# Altium PCB PCB2.PcbDoc
Units mm, origin at the board's own origin, x right, y up, seen from the top; angles counter-clockwise.
Board outline 65.79 x 83.57 mm, 2 copper layers (Top Layer, Bottom Layer); 34 components, 47 nets, 149 pads, 0 vias.
Unrouted connection lines stored in the file: 79.
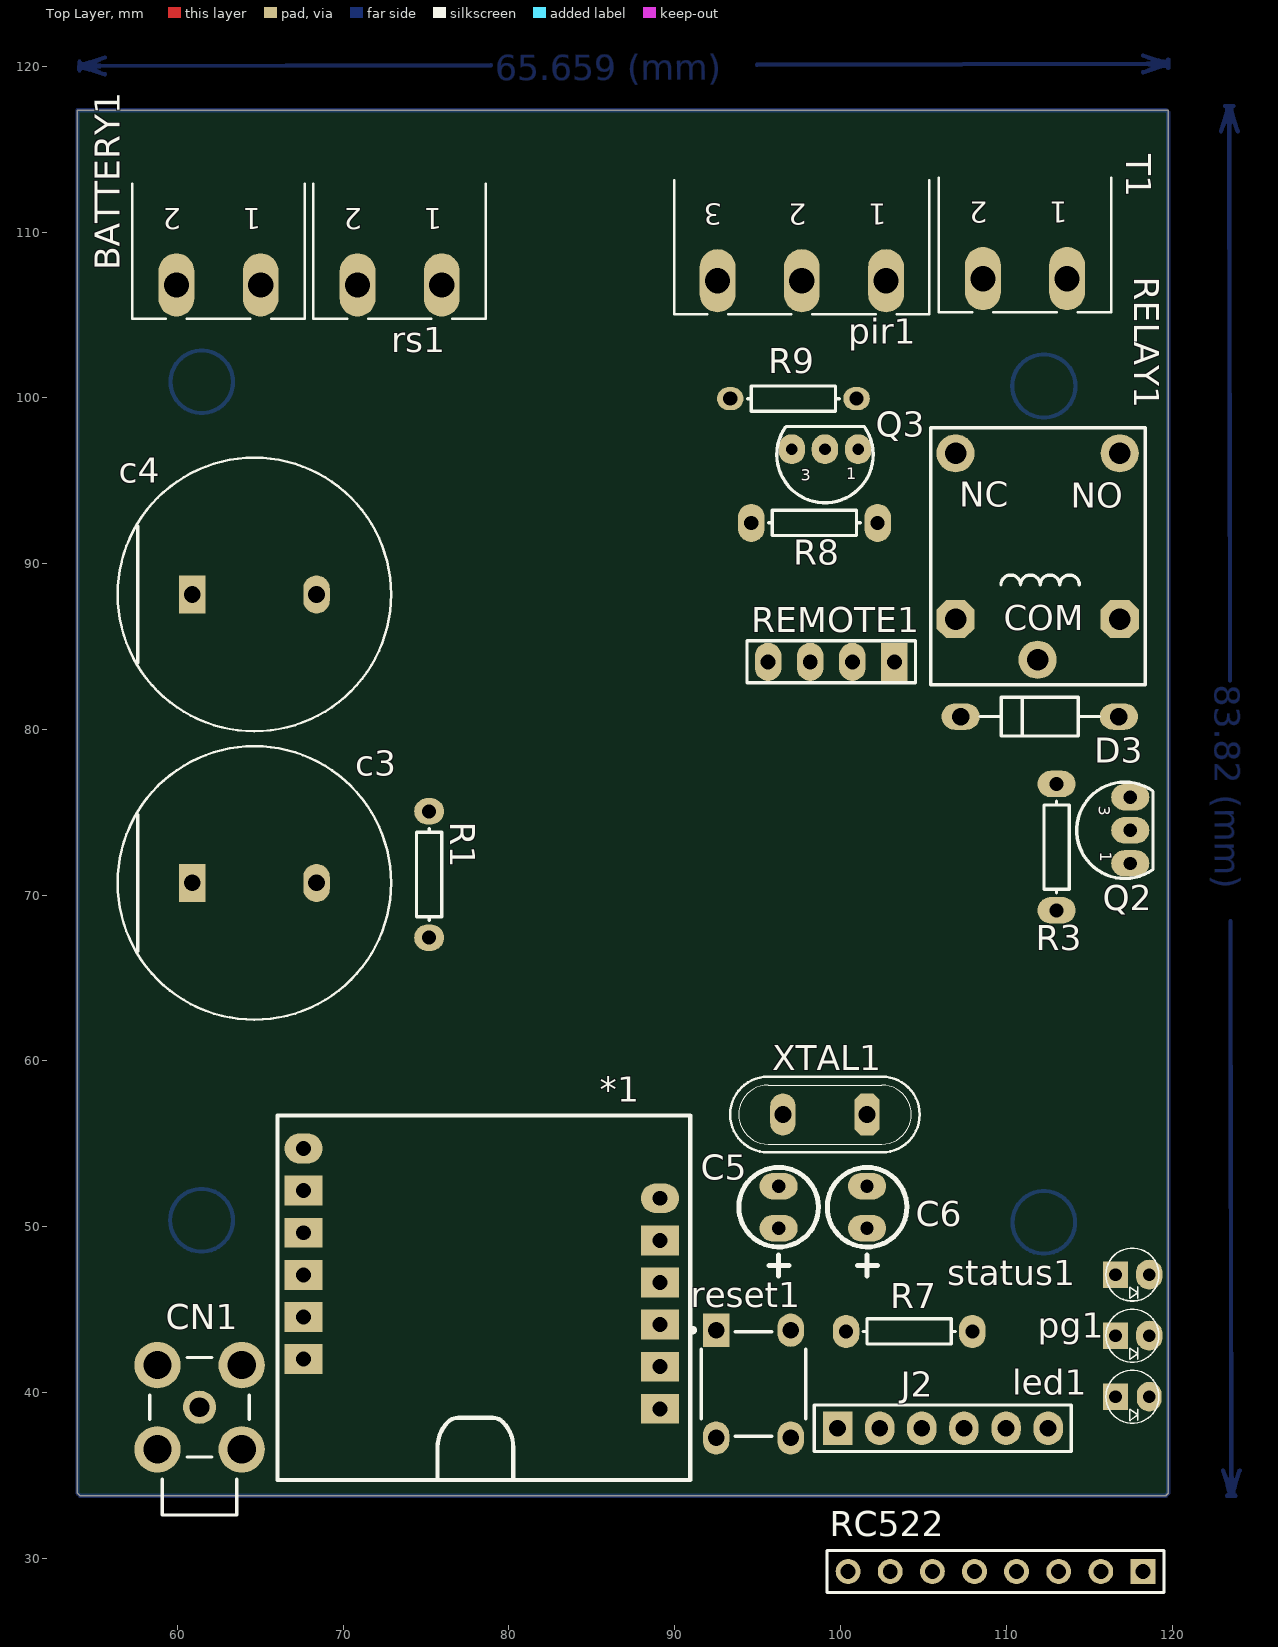
[diagram p0: Top Layer view]
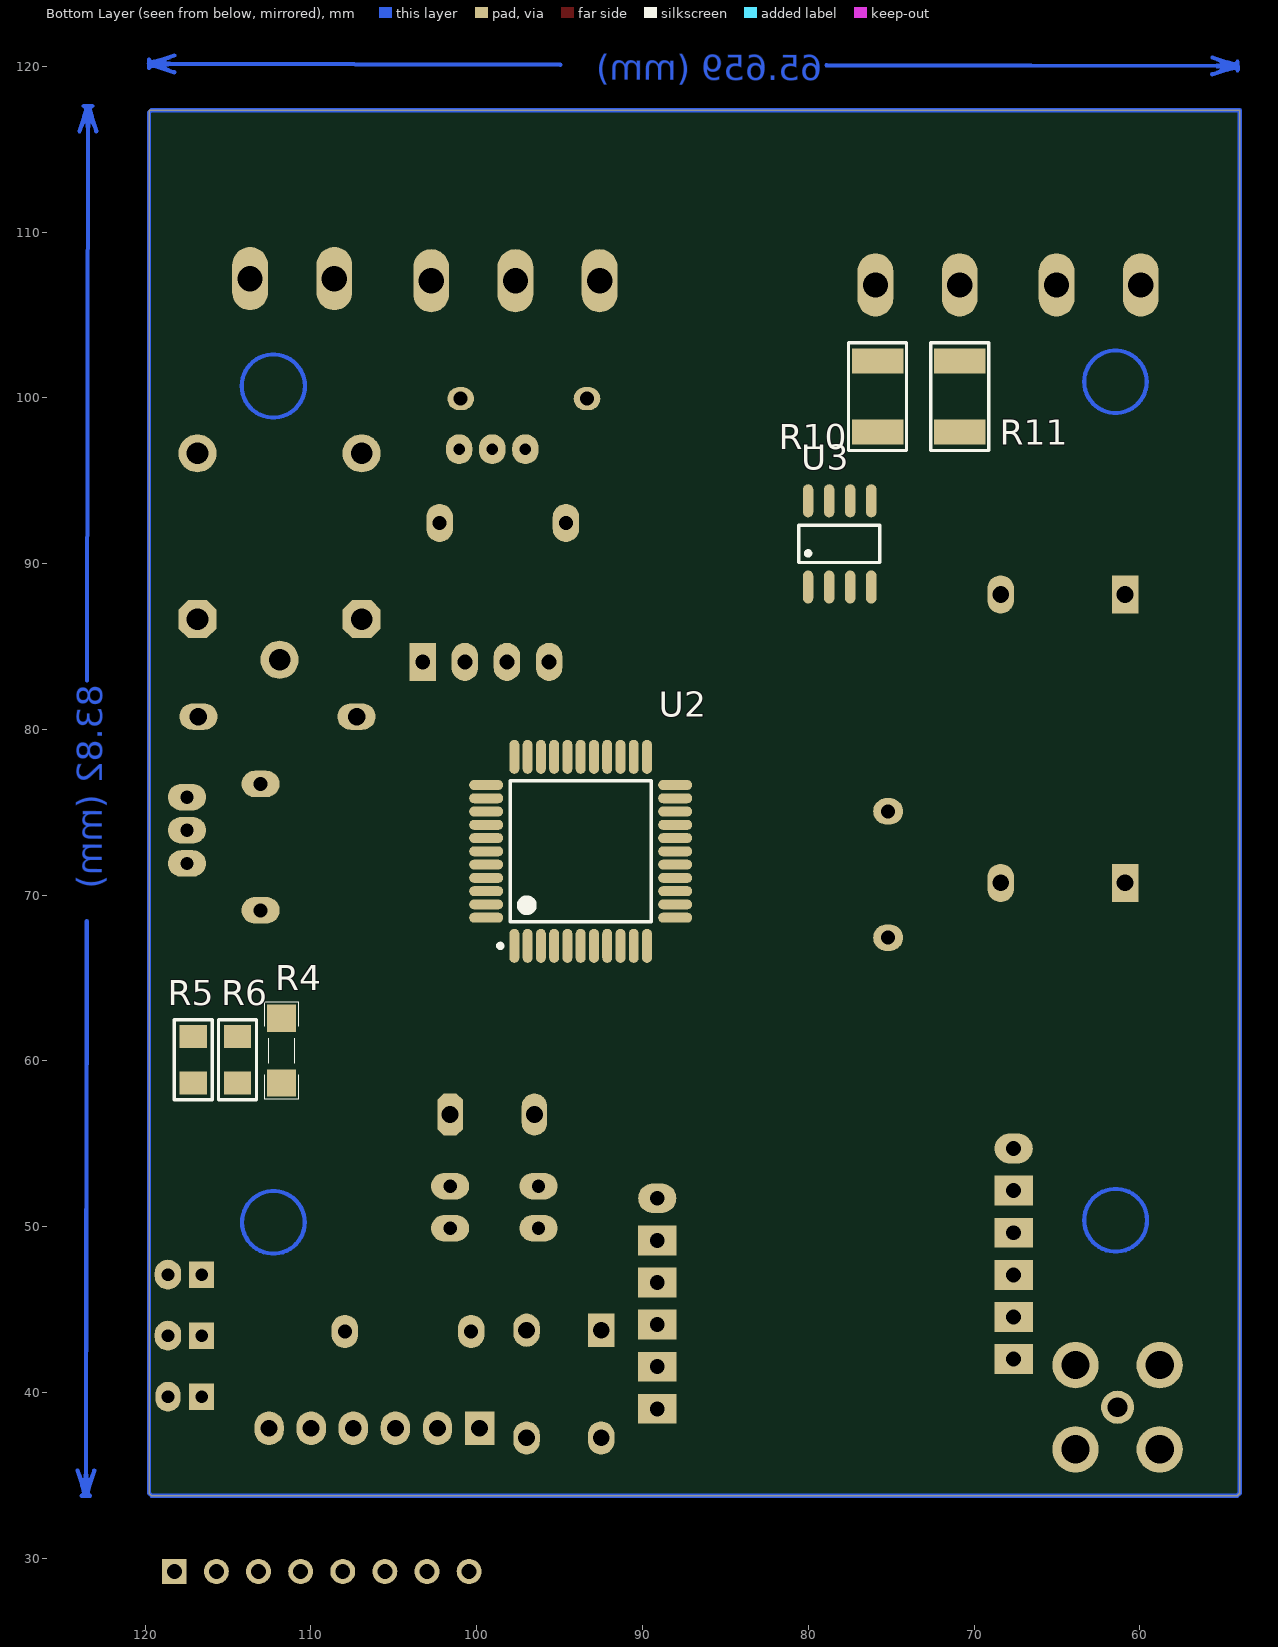
[diagram p1: Bottom Layer view, seen from below]

## Layer stack, top to bottom
Top Solder: solder mask 0.0102, Solder Resist, Dk 3.5
Top Layer: signal copper 0.0356
Dielectric 1: dielectric 0.32, FR-4, Dk 4.8
Bottom Layer: signal copper 0.0356
Bottom Solder: solder mask 0.0102, Solder Resist, Dk 3.5

## Board outline
53.975,33.931 54.124,33.782 119.612,33.782 119.761,33.931 119.761,117.348 53.975,117.348

## Design rules (kind name [scope] priority, off if disabled: settings)
Clearance [All] p1: gap=0.2 ignorepadtopadclearanceinfootprint=FALSE
PolygonConnect [All] p1: connectstyle=Relief reliefconductorwidth=0.254 reliefentries=4 polygonreliefangle="90 Angle" airgapwidth=0.254
RoomDefinition Sheet2 [InComponentClass('Sheet2')] p1: confinementstyle=ConfineIn formatcopy=TRUE lockcomponents=FALSE outline 0,0 50.8,0 50.8,25.4 0,25.4
RoutingVias [All] p1: holewidth=0.711 width=1.27 viastyle="Through Hole" minholewidth=0.711 minwidth=1.27 maxholewidth=0.711 maxwidth=1.27
SolderMaskExpansion [All] p1: expansion=0.102 istentingtop=FALSE
Width [All] p1: maxlimit=1.1 minlimit=0.5 preferedwidth=0.8
30 further rules are at their usual default settings.

## Components (designator, comment, footprint, x,y, rotation, side; value= is the part's Value field where it differs from the comment)
*1 "Component_1" PCBComponent_1 78.359,45.72 r180 top
BATTERY1 "PHOENIX" "MSTB 2,5/2-G-5,08" 62.484,106.807 r180 top
c3 "ECA1CM472" FP-RAD-TH-D_16_0_5-L_25_2-MFG 64.643,70.739 r0 top
c4 "ECA1CM472" FP-RAD-TH-D_16_0_5-L_25_2-MFG 64.643,88.138 r0 top
C5 "33PF" RB.1/.3 96.266,49.911 r270 top
C6 "33PF" RB.1/.3 101.6,49.911 r270 top
CN1 "ANTENNA" SMA-Right 61.341,39.116 r90 top
D3 "1N4007RLG" ONSC-AXIAL_LEAD-2-59-10_P 112.014,80.772 r0 top
J2 "Header6X1" "HEADER 6X1" 99.822,37.846 r0 top
led1 "LED3MM" LED3mm_GRN#1 117.602,39.751 r0 top
pg1 "LED3MM" LED3mm_GRN#2 117.602,43.434 r0 top
pir1 "PHOENIX" "MSTB 2,5/3-G-5,08" 97.663,107.061 r180 top
Q2 "C945" c945#1 117.475,73.914 r270 top
Q3 "C945" c945#2 99.06,96.901 r0 top
R1 "Res1" AXIAL-0.3#1 75.184,71.247 r90 top value=10K
R3 "Res1" AXIAL-0.3#2 113.03,72.898 r90 top value=330
R4 "1K" RESC4817X04N 111.76,60.624 r90 bottom
R5 "Resistor SMD" "1206 Resistor" 117.094,60.071 r90 bottom
R6 "Resistor SMD" "1206 Resistor" 114.427,60.071 r90 bottom
R7 "Res1" AXIAL-0.3#3 104.14,43.688 r0 top value=10K
R8 "Res1" AXIAL-0.3#2 98.425,92.456 r0 top value=330
R9 "Res1" AXIAL-0.3#4 97.155,99.949 r180 top value=330
R10 "Resistor SMD" "1812 Resistor" 75.819,100.076 r90 bottom
R11 "Resistor SMD" "1812 Resistor" 70.866,100.076 r90 bottom
RC522 "Header 8" HDR1X8 118.237,29.21 r180 top
RELAY1 "Relay" "Relay 15.40x12.10x13.10" 111.887,84.201 r0 top
REMOTE1 "Header 4" HDR1X4 103.251,84.074 r180 top
reset1 "EVQ-PAE09K" FP-EVQ-PAE09K-MFG 94.742,40.513 r0 top
rs1 "PHOENIX" "MSTB 2,5/2-G-5,08" 73.406,106.807 r180 top
status1 "LED3MM" LED3mm_GRN#2 117.602,47.117 r0 top
T1 "ALARM" "MSTB 2,5/2-G-5,08" 111.125,107.188 r180 top
U2 "ATmega16" 44A_M 93.726,72.644 r90 bottom
U3 "MAX485" SOIC-8 78.105,91.186 r90 bottom
XTAL1 "11.0592 MHz" My_Crystal 99.06,56.769 r180 top

## Footprints (in the part's own frame and the unit in brackets; to place one, negate y for a bottom-side part, rotate by r counter-clockwise, add the part's x,y. Pads: shape width x height; smd on the part's side, far side on the other; paste and mask are expansions set on the pad)
44A_M [mm] "Thin QFP, 44-Leads, Body 10x10mm, Pitch 0.8mm, IPC Low Density"
  oval 2.05x0.6 smd: 1(-5.7,4) 2(-5.7,3.2) 3(-5.7,2.4) 4(-5.7,1.6) 5(-5.7,0.8) 6(-5.7,0) 7(-5.7,-0.8) 8(-5.7,-1.6) 9(-5.7,-2.4) 10(-5.7,-3.2) 11(-5.7,-4) 23(5.7,-4) 24(5.7,-3.2) 25(5.7,-2.4) 26(5.7,-1.6) 27(5.7,-0.8) 28(5.7,0) 29(5.7,0.8) 30(5.7,1.6) 31(5.7,2.4) 32(5.7,3.2) 33(5.7,4)
  oval 0.6x2.05 smd: 12(-4,-5.7) 13(-3.2,-5.7) 14(-2.4,-5.7) 15(-1.6,-5.7) 16(-0.8,-5.7) 17(0,-5.7) 18(0.8,-5.7) 19(1.6,-5.7) 20(2.4,-5.7) 21(3.2,-5.7) 22(4,-5.7) 34(4,5.7) 35(3.2,5.7) 36(2.4,5.7) 37(1.6,5.7) 38(0.8,5.7) 39(0,5.7) 40(-0.8,5.7) 41(-1.6,5.7) 42(-2.4,5.7) 43(-3.2,5.7) 44(-4,5.7)
  silkscreen extent -5.82,-4.25 4.25,4.98, body extent -5,-5 5,5, height 1.2
"1206 Resistor" [mil]
  rect 55x65 smd: 1(-55,0) 2(55,0)
  silkscreen extent -95,-45 95,45, body extent -63,-31 63,31, height 24
"1812 Resistor" [mm]
  rect 1.5x3.1 smd: 1(-2.147,0) 2(2.147,0)
  silkscreen extent -3.25,-1.75 3.25,1.75, body extent -2.25,-1.6 2.25,1.6, height 1.6
AXIAL-0.3#1 [mm] "Axial Device, Thru-Hole; 2 Leads; 0.3 in Pin Spacing"
  oval 1.6x1.8 hole 0.85: 1(-3.81,0) 2(3.81,0)
  silkscreen extent -2.77,-0.76 2.77,0.76
AXIAL-0.3#2 [mm] "Axial Device, Thru-Hole; 2 Leads; 0.3 in Pin Spacing"
  oval 1.6x2.3 hole 0.85: 1(-3.81,0) 2(3.81,0)
  silkscreen extent -2.77,-0.76 2.77,0.76
AXIAL-0.3#3 [mm] "Axial Device, Thru-Hole; 2 Leads; 0.3 in Pin Spacing"
  oval 1.6x2 hole 0.85: 1(-3.81,0) 2(3.81,0)
  silkscreen extent -2.77,-0.76 2.77,0.76
AXIAL-0.3#4 [mm] "Axial Device, Thru-Hole; 2 Leads; 0.3 in Pin Spacing"
  oval 1.6x1.4 hole 0.85: 1(-3.81,0) 2(3.81,0)
  silkscreen extent -2.77,-0.76 2.77,0.76
c945#1 [mm] "NPN Transistor"
  oval 1.6x2.3 hole 0.8: 1(2,0) 2(0,0) 3(-2,0)
  silkscreen extent -2.91,-3.23 2.91,1.37, body extent -2.4,-2.18 2.36,1.45, height 9.82
c945#2 [mm] "NPN Transistor"
  oval 1.6x1.8 hole 0.7: 1(2,0) 2(0,0) 3(-2,0)
  silkscreen extent -2.91,-3.23 2.91,1.37, body extent -2.4,-2.18 2.36,1.45, height 9.82
FP-EVQ-PAE09K-MFG [mm]
  rect 1.6x2 hole 1 paste-1000 mask+0: A(-2.25,3.25)
  oval 1.6x2 hole 1 paste-1000 mask+0: A'(-2.25,-3.25) B(2.25,3.25) ""(2.25,-3.25)
  silkscreen extent -3.77,-3.15 3.15,3.37, body extent -3.25,-4.13 3.25,4.13, height 0.25
FP-RAD-TH-D_16_0_5-L_25_2-MFG [mm]
  rect 1.6x2.3 hole 1 paste-1000 mask+0: 1(-3.75,0)
  oval 1.6x2.3 hole 1 paste-1000 mask+0: 2(3.75,0)
  silkscreen extent -8.25,-8.25 8.25,8.25, body extent -8.35,-8.35 8.35,8.35, height 0.25
HDR1X4 [mm] "Connector; Header; 4 Position"
  rect 1.6x2.3 hole 0.9: 1(0,0)
  oval 1.6x2.3 hole 0.9: 2(2.54,0) 3(5.08,0) 4(7.62,0)
  silkscreen extent -1.27,-1.27 8.89,1.27, body extent -1.27,-1.28 8.89,1.26, height 8.38
HDR1X8 [mm] "Connector; Header; 8 Position"
  rect 1.5x1.5 hole 0.9: 1(0,0)
  round 1.5 hole 0.9: 2(2.54,0) 3(5.08,0) 4(7.62,0) 5(10.16,0) 6(12.7,0) 7(15.24,0) 8(17.78,0)
  silkscreen extent -1.27,-1.27 19.05,1.27
"HEADER 6X1" [mil]
  rect 70x80 hole 40: 1(0,0)
  oval 70x80 hole 40: 2(100,0) 3(200,0) 4(300,0) 5(400,0) 6(500,0)
  silkscreen extent -55,-55 555,55, body extent -52,-49 548,51, height 330
LED3mm_GRN#1 [mm]
  rect 1.5x1.6 hole 0.762: 1(-1.016,0)
  oval 1.5x1.8 hole 0.762: 2(1.016,0)
  silkscreen extent -1.6,-1.6 1.6,1.6, body extent -1.75,-1.75 1.75,1.75, height 3.9
LED3mm_GRN#2 [mm]
  rect 1.5x1.6 hole 0.762: 1(-1.016,0)
  oval 1.6x1.8 hole 0.762: 2(1.016,0)
  silkscreen extent -1.6,-1.6 1.6,1.6, body extent -1.75,-1.75 1.75,1.75, height 3.9
"MSTB 2,5/2-G-5,08" [mil] "Header, Nominal current: 12 A Rated voltage (III/2): 320 V Number of positions: 2 Pitch: 5.08 mm Color: green Contact surface: Tin Assembly: Soldering DESIGNER:ABBAS BASEREH"
  oval 85x150 hole 60: 1(-100,0) 2(100,0)
  silkscreen extent -205,-240 205,80, body extent -199,-394 201,79, height 340
"MSTB 2,5/3-G-5,08" [mil] "Header, Nominal current: 12 A Rated voltage (III/2): 320 V Number of positions: 3 Pitch: 5.08 mm Color: green Contact surface: Tin Assembly: Soldering  DESIGNER:ABBAS BASEREH"
  oval 85x150 hole 60: 1(-200,0) 2(0,0) 3(200,0)
  silkscreen extent -303,-238 303,80, body extent -300,-394 300,79, height 340
My_Crystal [mil]
  oct 60x100 hole 40: 1(-100,0)
  oval 60x100 hole 40: 2(100,0)
  silkscreen extent -225,-90 225,90
ONSC-AXIAL_LEAD-2-59-10_P [mm] "AXIAL, 2-Leads, Diameter 2.35mm"
  oval 2.3x1.6 hole 1.05: 1(-4.77,0) 2(4.77,0)
  silkscreen extent -3.6,-1.18 3.6,1.18
PCBComponent_1 [mm]
  rect 2.3x1.8 hole 0.9: 0(-10.75,6.7) 1(-10.75,4.16) 2(-10.75,1.62) 3(-10.75,-0.92) 4(-10.75,-3.46) 6(10.75,3.7) 7(10.75,1.16) 8(10.75,-1.38) 9(10.75,-3.92) 10(10.75,-6.46)
  oval 2.3x1.8 hole 0.9: 5(-10.75,-6) 11(10.75,-9)
  silkscreen extent -12.57,-11 12.32,11
RB.1/.3 [mm]
  oval 1.6x2.3 hole 0.8: 1(0,0) 2(-2.54,0)
  silkscreen extent -3.67,-2.4 2.87,2.4
"Relay 15.40x12.10x13.10" [mm]
  round 2.3 hole 1.3: 1(0,0) 2(-4.95,12.45) 3(4.95,12.45)
  oct 2.3x2.3 hole 1.3: 4(-4.95,2.45) 5(4.95,2.45)
  silkscreen extent -6.45,-1.5 6.5,14, body extent -6.05,-1.3 6.05,14, height 16.1
RESC4817X04N [mm] "Chip Resistor, 2-Leads, Body 4/80x1/70mm, IPC Medium Density-Design:Abbas Basereh"
  rect 1.65x1.75 smd: 1(-1.95,0) 2(1.95,0)
  silkscreen extent -2.92,-1.02 2.92,1.02, body extent -1.6,-0.8 1.6,0.8, height 1
SMA-Right [mm]
  round 2 hole 1.2: 1(0,0)
  round 2.8 hole 1.7: 2(-2.54,-2.54) 2(-2.54,2.54) 2(2.54,-2.54) 2(2.54,2.54)
  silkscreen extent -6.5,-3 3,3, body extent -11.6,-3.5 3.5,3.5, height 9.86
SOIC-8 [mm]
  oval 2x0.625 smd: 1(-2.6,1.905) 2(-2.6,0.635) 3(-2.6,-0.635) 4(-2.6,-1.905) 5(2.6,-1.905) 6(2.6,-0.635) 7(2.6,0.635) 8(2.6,1.905)
  silkscreen extent -1.13,-2.41 1.13,2.47, body extent -3.1,-2.41 3.1,2.41, height 1.7

## Part data
BATTERY1 rs1 T1: library part CON_Phoenix_MSTB_02, "2 Pitch: 5.08 mm Color: green Contact surface: Tin Assembly", Manufacturer="PHOENIX CONTACT", Max Current="12 A", Voltage="320 V", Category=Connector, ComponentLink1Description="Header, Nominal current: 12 A Rated voltage (III/2): 320 V Number of positions: 2 Pitch: 5.08 mm Color: green Contact surface: Tin Assembly: Soldering  DESIGNER:ABBAS BASEREH", ComponentLink2Description=Reference, Connector Type="PCB Terminal Block", Designer="ABBAS BASEREH", Mounting Technology=Through-Hole, PART.NO=PHOENIX, Pin Count=2, Positions=2, Revision 1=2017-3-1, Status=Unreleased
c3 c4: library part CMP-05427-001624-1, "Aluminum Electrolytic Capacitors (Radial Lead Type) 4700uF ±20% 16V", Capacitance=4.7mF, Case/Package=Radial, Dielectric Material=Aluminium, Leakage Current=3uA, Max Operating Temperature=85°C, Min Operating Temperature=-40°C, Package Quantity=100, Ripple Current=1.36A, Tolerance=20%, Voltage=16V, Construction=RADIAL, Diameter=16mm, Dissipation Factor=0.26%, Height=25mm, Height - Seated (Max)=1.063inch, Lead Diameter=0.8mm, Lead Free="Lead Free", Lead Pitch=7.5mm, Lead/Base Style=Straight, Length=25mm, Life (Hours)=2000Hour, Mount="Through Hole", Number of Pins=2, Packaging=Bulk, Polarity=Polar, Radiation Hardening=No, REACH SVHC="No SVHC", RoHS Compliant=Yes, Series=M, Termination=Radial, Voltage Rating=16V, Voltage Rating (DC)=16V
C5 C6: library part "Cap Semi", "Capacitor (Semiconductor SIM Model)", LatestRevisionDate=29-May-2009, LatestRevisionNote="IPC-7351 Footprint Added.", PackageDescription="Chip Capacitor", PackageReference=C1206, Published=8-Jun-2000, Publisher="Altium Limited"
D3: library part CMP-0902-00147-1, "Standard Recovery Rectifier, 2-Pin Axial_Lead, Pb-Free, Tape and Reel", Manufacturer="On Semiconductor", ComponentLink1Description="Manufacturer URL", ComponentLink1URL=http://www.onsemi.com/, ComponentLink2Description=Datasheet, ComponentLink2URL=http://www.onsemi.com/pub_link/Collateral/1N4001-D.PDF, ComponentLink3Description="Package Specification", ComponentLink3URL=http://www.onsemi.cn/pub_link/Collateral/59-10.PDF, DatasheetVersion="Rev. 13", IFSM Max (A)=30, IO(rec) Max (A)=1, Mounting Technology="Through Hole", PackageDescription="2-Pin, Axial Lead, Diameter 2.35 mm", PackageReference=AXIAL_LEAD-2-59-10, PackageVersion="Rev. U, 02/2005", Packing="Tape and Reel", PartNumber=1N4007RLG, RoHS=TRUE, Type="Standard Recovery", VRRM Max (V)=1000
led1 pg1 status1: library part "LED 3MM", "Light Emitting Diode", Designer="Ali Hafizi"
pir1: library part CON_Phoenix_MSTB_03, "3 Pitch: 5.08 mm Color: green Contact surface: Tin Assembly", Manufacturer="PHOENIX CONTACT", Max Current="12 A", Voltage="320 V", Category=Connector, ComponentLink1Description="Header, Nominal current: 12 A Rated voltage (III/2): 320 V Number of positions: 3 Pitch: 5.08 mm Color: green Contact surface: Tin Assembly: Soldering  DESIGNER:ABBAS BASEREH", ComponentLink2Description=Reference, Connector Type="PCB Terminal Block", Designer="ABBAS BASEREH", Mounting Technology=Through-Hole, PART.NO=PHOENIX, Pin Count=3, Positions=3, Revision 1=2017-3-1, Status=Unreleased
Q2 Q3: "NPN Silicon Epitaxial Planar Transistor", ComponentLink1Description="Manufacturer Link", ComponentLink1URL=http://www.taitroncomponents.com/, ComponentLink2Description=Datasheet, ComponentLink2URL=http://www.taitroncomponents.com/, DatasheetVersion=2017, LatestRevisionDate=2017, LatestRevisionNote="IPC-7351 Footprint Added.", PackageDescription="3-Pin SOT-23 Package 0.95 mm Pitch, 2.3 mm Lead Span", PackageReference=SOT23, PackageVersion=2017-2-8, Published=2017-2-8, Publisher="Abbas Basereh"
R1 R3 R7 R8 R9: "Resistor", LatestRevisionDate=17-Jul-2002, LatestRevisionNote="Re-released for DXP Platform.", PackageDescription="Axial Device, Thru-Hole; 2 Leads; 0.3 in Pin Spacing", PackageReference=AXIAL-0.3, Published=8-Jun-2000, Publisher="Altium Limited"
R4: library part "RES 1206 0.25W", "RES 1206", Data=16-12-2016, Desc.="RES SMD 1206", Designer="Abbas Basereh"
RC522: "Header, 8-Pin", LatestRevisionDate=17-Jul-2002, LatestRevisionNote="Re-released for DXP Platform.", Publisher="Altium Limited"
RELAY1: library part "RELAY General", "Relay_SPDT POWER NEEDLE", Company=E.P.I.L, Design_Date=2011/10/31, Designer="Ali Hafizi"
REMOTE1: "Header, 4-Pin", LatestRevisionDate=17-Jul-2002, LatestRevisionNote="Re-released for DXP Platform.", Publisher="Altium Limited"
reset1: library part CMP-05618-000085-1, "SWITCH TACTILE SPST-NO 0.02A 15V", Actuator Color=Black, Contact Current Rating=20mA, Contact Resistance=50mR, Max Operating Temperature=70°C, Max Voltage Rating (DC)=15V, Min Operating Temperature=-20°C, Operating Force=1.6N, Package Quantity=500, Actuator Length=5.6mm, Actuator Type=Standard, Color=Black, Contact Plating=Gold, Current Rating=20mA, Depth=7.8mm, Electrical Life=100000Cycles, Height=9.5mm, Illumination Type=Non-Illuminated, Lead Free="Lead Free", Length=6mm, Max Current Rating=20mA, Mechanical Life=100000Cycles, Mount="Through Hole", Orientation=Straight, Packaging=Bulk, Radiation Hardening=No, RoHS Compliant=Yes, Series=EVQPA, Size=6mm, Switch Function=Off-Mom, Switch Travel=0.25mm, Termination="PC Pin", Throw Configuration=SPST, Voltage Rating (DC)=15V, Width=6mm
U2: library part CMP-0095-00235-2, "8-bit AVR Microcontroller, 4.5-5.5V, 16KB Flash, 512 Bytes EEPROM, 1KB SRAM, 44-pin TQFP, Industrial Grade (-40°C to 85°C), Pb-Free", Code_JEDEC=MS-026-ACB, ComponentLink1Description="Manufacturer URL", ComponentLink1URL=http://www.atmel.com/, ComponentLink2Description="ATmega16(L)  Datasheet", ComponentLink2URL=http://www.atmel.com/dyn/resources/prod_documents/doc2466.pdf, ComponentLink3Description="ATmega16(L) Summary", ComponentLink3URL=http://www.atmel.com/dyn/resources/prod_documents/2466S.pdf, DatasheetVersion="revT, Jul-2010", PackageDescription="44-Pin Plastic Thin Profile Quad Flat Pack, 10 x 10 x 1.0 mm Body, 0.8 mm Pitch (TQFP)", PackageReference=44A, PackageVersion="revC, Oct-2010", RevisionNote="DatasheetVersion & PackageVersion updated. URLs added."
XTAL1: library part CRYSTAL, "Crystal"

## Nets (pads, with @x,y where several pads share a name; then routed paths per layer and width w, separated by ;. In a path a pad name is that pad's centre, name@x,y a point inside that pad or via, vN(x,y) a via of type N, cw(c..) or ccw(c..) an arc to the next point about the centre after c; other vN are vias at no path point)
3/3: RC522.1
485en: U2.23 U3.2 U3.3
+12: D3.1 pir1.1 RELAY1.1 RELAY1.4
ALARM: D3.2 Q2.2 RELAY1.5
ALARMOUT: R3.2 U2.34
ANTEN: *1.0 CN1.1
DATAIN: REMOTE1.2 REMOTE1.3 U2.30
GND: *1.5 BATTERY1.2 c3.1 c4.1 C5.1 C6.1 CN1.2 J2.1 led1.2 pg1.2 pir1.3 Q2.3 Q3.3 RC522.3 REMOTE1.1 reset1.A reset1.A' status1.2 T1.2 U2.6 U3.5
INT0: U2.11
INT1: U2.12
IRQ: RC522.4
led4: R4.2 U2.40
LOCKIN: U2.42
LOCKOUT: U2.35
MISO: J2.5 RC522.5 U2.2
MOSI: J2.6 RC522.6 U2.1
Netled1_1: led1.1 R4.1
Netpg1_1: pg1.1 R6.1
NetQ2_1: Q2.1 R3.1
NetQ3_1: Q3.1 R9.1
NetR5_1: R5.1 status1.1
NetR10_1: R10.1 U3.7
NetR10_2: R10.2 rs1.1
NetR11_1: R11.1 U3.6
NetR11_2: R11.2 rs1.2
NetRELAY1_3: RELAY1.3 T1.1
pg: R6.2 U2.37
pir: Q3.2 R8.2 U2.24
pirin: pir1.2 R9.2
RESET: J2.3 R7.2 reset1.B U2.4
rst: RC522.2
RX0: *1.4 U2.9
rx2: U2.21 U3.1
SCK: J2.4 RC522.7 U2.3
sda: RC522.8
SIMRST: *1.2 R1.1 U2.13
SIMRST1: U2.19
simturnon: U2.20
simturnon1: U2.14
SS: U2.44
status: R5.2 U2.36
TX0: *1.3 U2.10
tx2: U2.22 U3.4
vcc: *1.1 c3.2 c4.2 J2.2 R1.2 R7.1 R8.1 REMOTE1.4 U2.5 U2.17 U3.8
"vdc in": BATTERY1.1
XTAL1: C5.2 U2.8 XTAL1.2
XTAL2: C6.2 U2.7 XTAL1.1
pads on no net: *1.6 *1.7 *1.8 *1.9 *1.10 *1.11 RELAY1.2 reset1. U2.15 U2.16 U2.18 U2.25 U2.26 U2.27 U2.28 U2.29 U2.31 U2.32 U2.33 U2.38 U2.39 U2.41 U2.43
copper on no net: | length 479.8
  Bottom Layer w0.254: 54.102,119.761 54.102,120.269 ; 55.625,120.526 54.102,120.015 ; 55.627,119.51 54.102,120.015 ; 78.908,120.063 54.102,120.015 ; 94.955,120.094 119.761,120.142 ; 118.236,120.647 119.761,120.142 ; 118.238,119.631 119.761,120.142 ; 119.761,119.888 119.761,120.396 ; 122.938,116.077 123.444,117.602 ; 123.061,35.305 123.571,33.782 ; 123.19,117.602 123.698,117.602 ; 123.317,33.782 123.825,33.782 ; 123.496,82.954 123.444,117.602 ; 123.519,68.43 123.571,33.782 ; 123.954,116.079 123.444,117.602 ; 124.077,35.307 123.571,33.782 ; 53.975,33.931 53.975,117.348 119.612,117.348 119.761,117.199 119.761,33.931 119.612,33.782 54.124,33.782 53.975,33.931 ; 63.356,50.393 ccw(c61.46,50.393) 63.356,50.393 ; 63.357,100.965 ccw(c61.472,100.965) 63.357,100.965 ; 114.149,50.266 ccw(c112.26,50.266) 114.149,50.266 ; 114.171,100.711 ccw(c112.264,100.711) 114.171,100.711

## Other copper
Bottom Layer:
  text "65.659 (mm)" at 79.163,119.149 h1.52 r0.11
  text "83.82 (mm)" at 122.583,82.699 h1.52 r270.09

## Text inside footprints (layer, text, board x,y; h text height)
BATTERY1: Top Overlay "2" at 60.23,111.442 h1.27 r180; Top Overlay "1" at 65.056,111.442 h1.27 r180
pir1: Top Overlay "1" at 102.775,111.696 h1.27 r180; Top Overlay "2" at 97.949,111.696 h1.27 r180; Top Overlay "3" at 92.869,111.696 h1.27 r180
Q2: Top Overlay "1" at 115.665,72.619 h0.7 r270; Top Overlay "3" at 115.57,75.387 h0.7 r270
Q3: Top Overlay "1" at 100.355,95.091 h0.7; Top Overlay "3" at 97.587,94.996 h0.7
RELAY1: Top Overlay "NC" at 107.163,93.421 h1.5; Top Overlay "NO" at 113.894,93.37 h1.5; Top Overlay "COM" at 109.855,85.979 h1.5
rs1: Top Overlay "2" at 71.152,111.442 h1.27 r180; Top Overlay "1" at 75.978,111.442 h1.27 r180
T1: Top Overlay "2" at 108.871,111.823 h1.27 r180; Top Overlay "1" at 113.697,111.823 h1.27 r180